# EAGLE board QwiicHUD-Panel (EAGLE 7.7.0), part 1 of 2
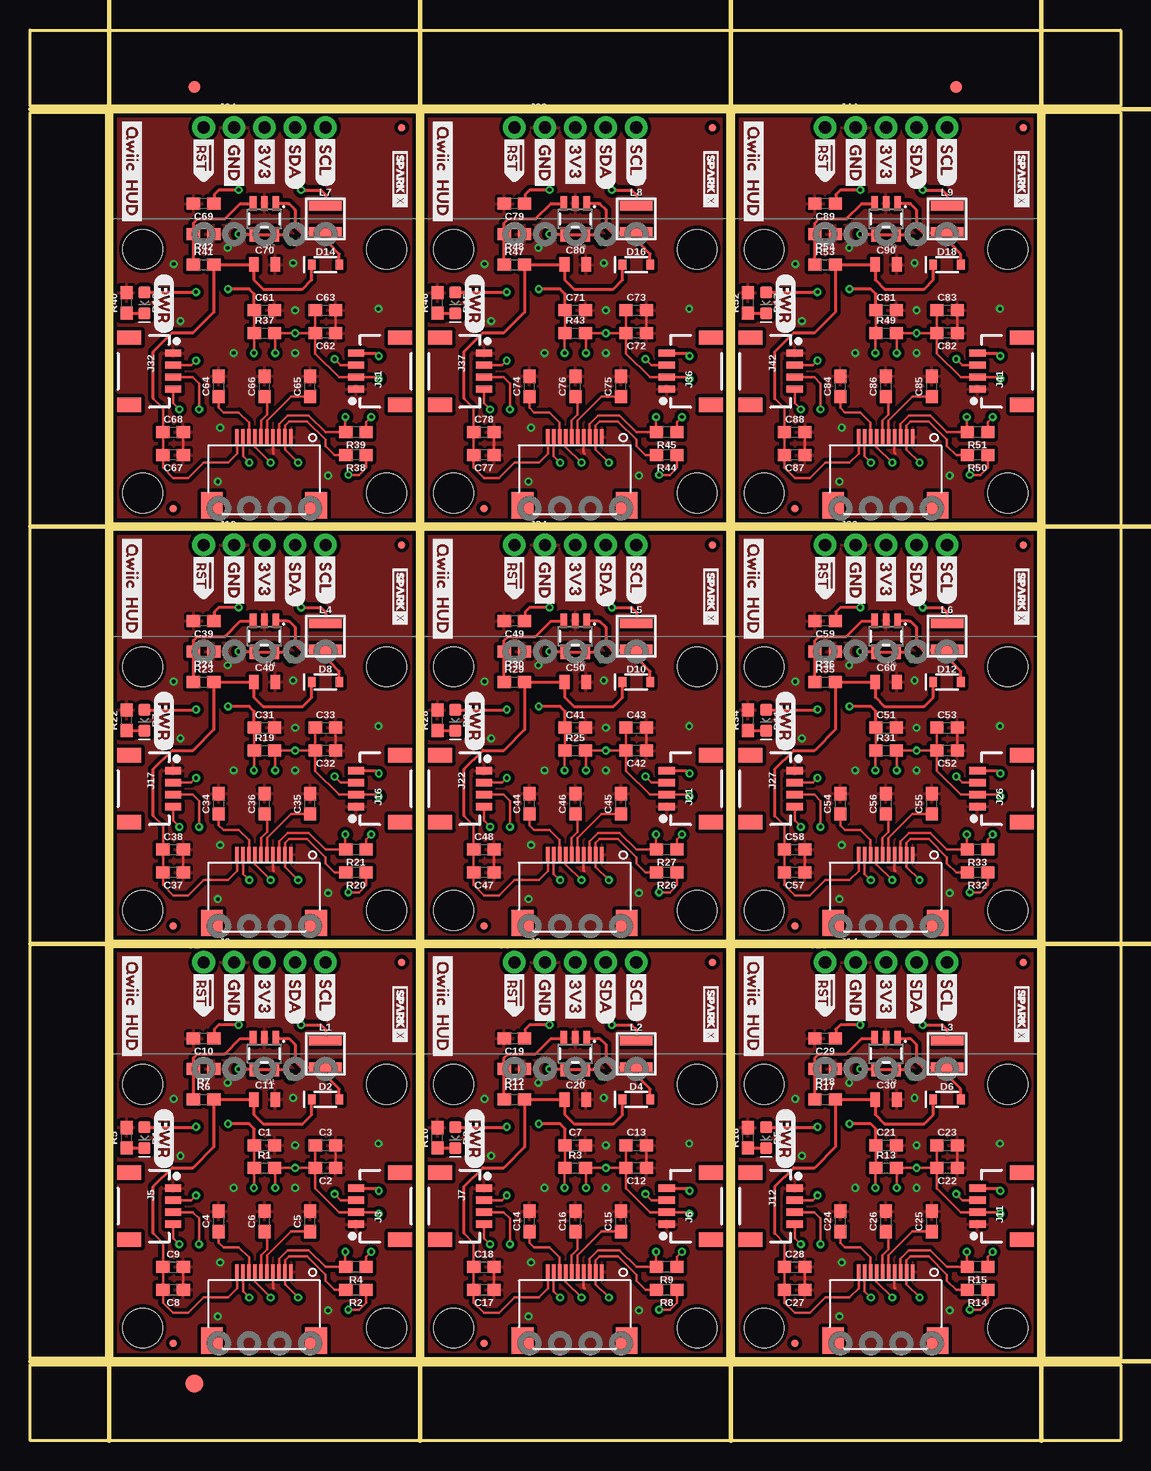
[diagram p0: board, top side]
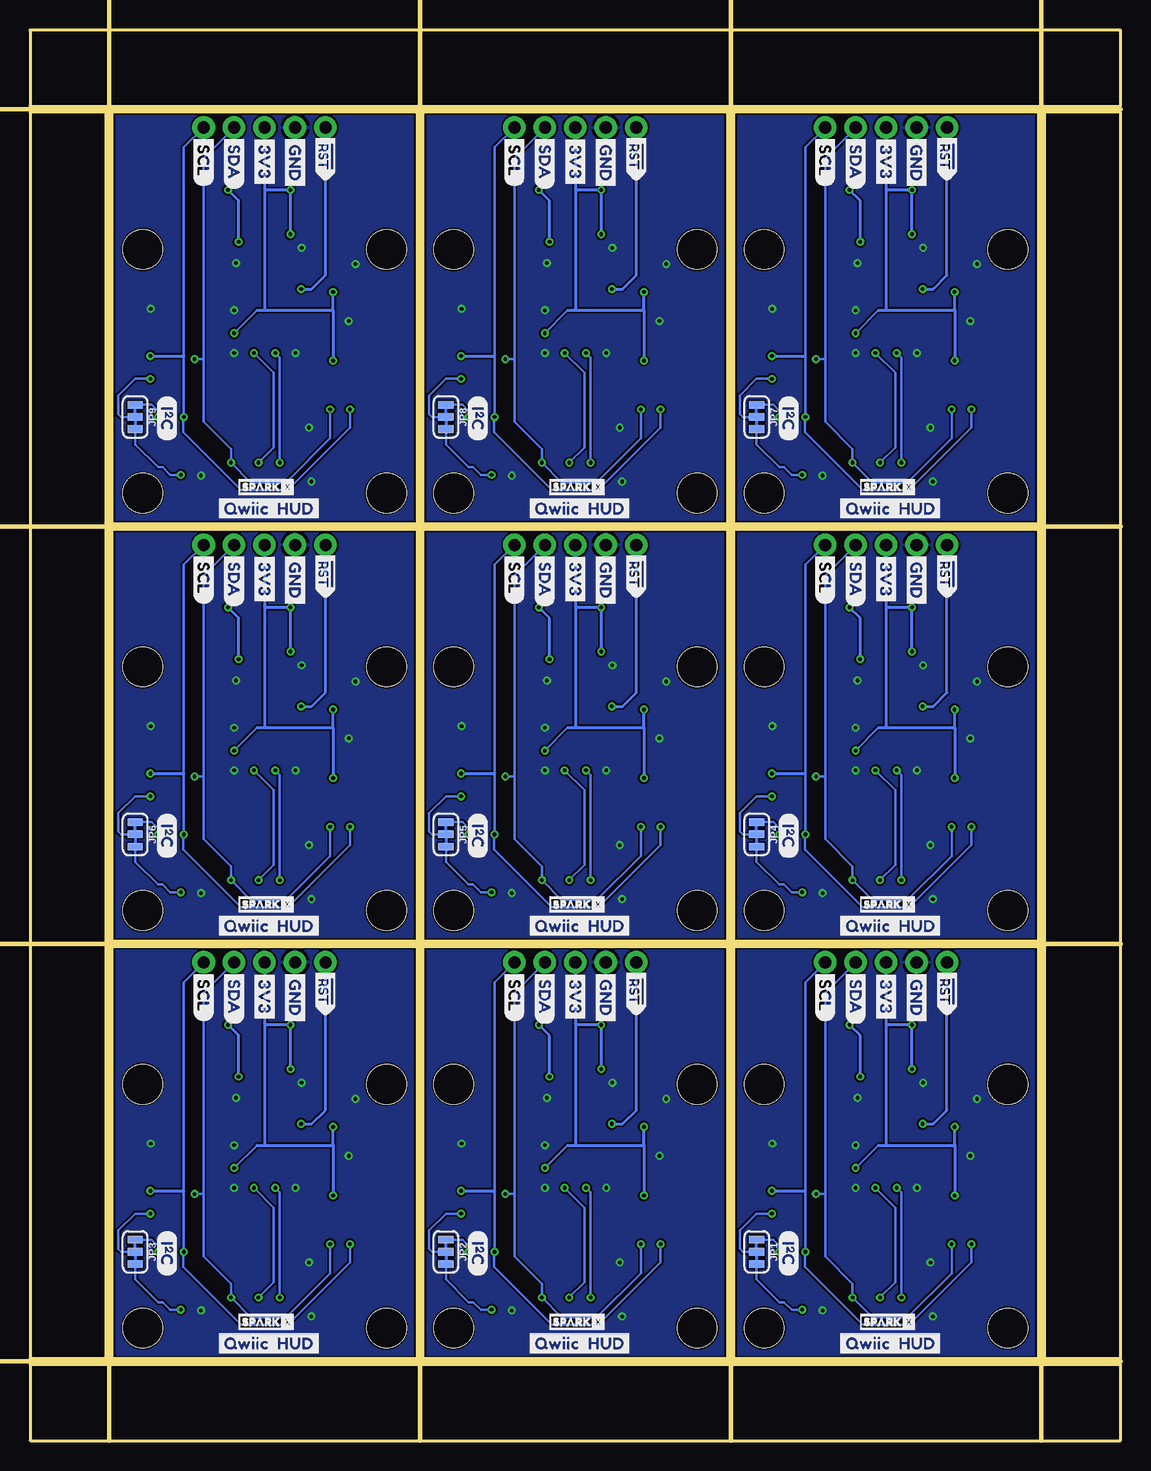
[diagram p1: board, bottom side, seen from below]

Size 90.93 x 117.6 mm. Coordinates in mm from the lower left corner, seen from the top.
Outline: 6.86,41.15 32.26,41.15 32.26,6.86 6.86,6.86 6.86,41.15
Outline: 32.77,41.15 58.17,41.15 58.17,6.86 32.77,6.86 32.77,41.15
Outline: 58.67,41.15 84.07,41.15 84.07,6.86 58.67,6.86 58.67,41.15
Outline: 6.86,75.95 32.26,75.95 32.26,41.66 6.86,41.66 6.86,75.95
Outline: 32.77,75.95 58.17,75.95 58.17,41.66 32.77,41.66 32.77,75.95
Outline: 58.67,75.95 84.07,75.95 84.07,41.66 58.67,41.66 58.67,75.95
Outline: 6.86,110.74 32.26,110.74 32.26,76.45 6.86,76.45 6.86,110.74
Outline: 32.77,110.74 58.17,110.74 58.17,76.45 32.77,76.45 32.77,110.74
Outline: 58.67,110.74 84.07,110.74 84.07,76.45 58.67,76.45 58.67,110.74
Outline: 0,6.35 90.93,6.35 90.93,0 0,0 0,6.35
Outline: 84.58,110.74 90.93,110.74 90.93,6.86 84.58,6.86 84.58,110.74
Outline: 0,117.6 90.93,117.6 90.93,111.25 0,111.25 0,117.6
Outline: 0,110.74 6.35,110.74 6.35,6.86 0,6.86 0,110.74
Copper layers (1*16): Top 0.035mm / dielectric 1.5mm / Bottom 0.035mm
Design rules "SparkFun-2-layer-PCBWay-LIMIT": minimum track width 6mil, minimum drill 0.3mm, track to track 6mil, track to pad 6mil, pad to pad 6mil, via to via 6mil, smd to smd 6mil, copper to edge 6mil, drill to drill 6mil, minimum pad ring 7mil, minimum via ring 7mil, stop-mask expansion 4mil, vias tented up to drill 25mil, thermal gap 10mil
Milling: 8 lines

## Footprints (pad centres in the part's own frame; a part is rotated, then mirrored left to right if it is on the bottom)
0603 = smd 1.1 x 1: 1 -0.85,0; 2 0.85,0
0805 = smd 0.8 x 1.2: 1 -0.9,0; 2 0.9,0
LED-0603 = smd 1 x 1: A -0.877,0; C 0.877,0
SOD-323 = smd 0.63 x 0.83: A 1.15,0; C -1.15,0
FIDUCIAL-1X2 = smd 1 x 1: 1 0,0
FIDUCIAL-1.5X3 = smd 1.5 x 1.5: 1 0,0
FIDUCIAL-MICRO = smd 0.635 x 0.635: 1 0,0
1X01_NO_SILK = drill 1.016 pad 1.88: 1 0,0
1X04_NO_SILK = drill 1.016 pad 1.88: 1 0,0; 2 2.54,0; 3 5.08,0; 4 7.62,0
1X04_1MM_RA = smd 0.6 x 1.35: 1 -1.5,0; 2 -0.5,0; 3 0.5,0; 4 1.5,0 | smd 1.2 x 2: NC1 2.8,-3.675; NC2 -2.8,-3.675
SERIES6288 = smd 0.3 x 1.3: 1 -2.3,3.4; 2 -1.8,3.4; 3 -1.3,3.4; 4 -0.8,3.4; 5 -0.3,3.4; 6 0.2,3.4; 7 0.7,3.4; 8 1.2,3.4; 9 1.7,3.4; 10 2.2,3.4 | smd 1.8 x 2.2: NC1 -4.4,-2.3; NC2 4.3,-2.3
SMT-JUMPER_3_2-NC_TRACE_SILK = smd 0.635 x 1.27: 1 -1.016,0; 2 0,0; 3 1.016,0
INDUCTOR_3X3 = smd 2.7 x 0.8: P$1 0,1.1; P$2 0,-1.1
SOT23-5 = smd 0.55 x 1.2: 1 -0.95,-1.3; 2 0,-1.3; 3 0.95,-1.3; 4 0.95,1.3; 5 -0.95,1.3
QWIIC_BOARD_MOUNT_HOLES = hole 3.302: -10.16,10.16; 10.16,10.16; 10.16,-10.16; -10.16,-10.16

## Placement (x,y rotation side)
C1  2.2uF  [0603]  19.56,24.64 0 top
C2  4.7uF  [0603]  24.64,22.73 180 top
C3  0.1uF  [0603]  24.64,24.64 0 top
C4  1.0uF  [0603]  15.75,18.29 90 top
C5  1.0uF  [0603]  23.37,18.29 90 top
C6  1.0uF  [0603]  19.56,18.29 90 top
C7  2.2uF  [0603]  45.47,24.64 0 top
C8  4.7uF  [0603]  11.94,12.57 180 top
C9  0.1uF  [0603]  11.94,14.48 0 top
C10  1.0uF  [0603]  14.48,33.53 180 top
C11  1.0uF/25V  [0805]  19.56,28.45 0 top
C12  4.7uF  [0603]  50.55,22.73 180 top
C13  0.1uF  [0603]  50.55,24.64 0 top
C14  1.0uF  [0603]  41.66,18.29 90 top
C15  1.0uF  [0603]  49.28,18.29 90 top
C16  1.0uF  [0603]  45.47,18.29 90 top
C17  4.7uF  [0603]  37.85,12.57 180 top
C18  0.1uF  [0603]  37.85,14.48 0 top
C19  1.0uF  [0603]  40.39,33.53 180 top
C20  1.0uF/25V  [0805]  45.47,28.45 0 top
C21  2.2uF  [0603]  71.37,24.64 0 top
C22  4.7uF  [0603]  76.45,22.73 180 top
C23  0.1uF  [0603]  76.45,24.64 0 top
C24  1.0uF  [0603]  67.56,18.29 90 top
C25  1.0uF  [0603]  75.18,18.29 90 top
C26  1.0uF  [0603]  71.37,18.29 90 top
C27  4.7uF  [0603]  63.75,12.57 180 top
C28  0.1uF  [0603]  63.75,14.48 0 top
C29  1.0uF  [0603]  66.29,33.53 180 top
C30  1.0uF/25V  [0805]  71.37,28.45 0 top
C31  2.2uF  [0603]  19.56,59.44 0 top
C32  4.7uF  [0603]  24.64,57.53 180 top
C33  0.1uF  [0603]  24.64,59.44 0 top
C34  1.0uF  [0603]  15.75,53.09 90 top
C35  1.0uF  [0603]  23.37,53.09 90 top
C36  1.0uF  [0603]  19.56,53.09 90 top
C37  4.7uF  [0603]  11.94,47.37 180 top
C38  0.1uF  [0603]  11.94,49.28 0 top
C39  1.0uF  [0603]  14.48,68.33 180 top
C40  1.0uF/25V  [0805]  19.56,63.25 0 top
C41  2.2uF  [0603]  45.47,59.44 0 top
C42  4.7uF  [0603]  50.55,57.53 180 top
C43  0.1uF  [0603]  50.55,59.44 0 top
C44  1.0uF  [0603]  41.66,53.09 90 top
C45  1.0uF  [0603]  49.28,53.09 90 top
C46  1.0uF  [0603]  45.47,53.09 90 top
C47  4.7uF  [0603]  37.85,47.37 180 top
C48  0.1uF  [0603]  37.85,49.28 0 top
C49  1.0uF  [0603]  40.39,68.33 180 top
C50  1.0uF/25V  [0805]  45.47,63.25 0 top
C51  2.2uF  [0603]  71.37,59.44 0 top
C52  4.7uF  [0603]  76.45,57.53 180 top
C53  0.1uF  [0603]  76.45,59.44 0 top
C54  1.0uF  [0603]  67.56,53.09 90 top
C55  1.0uF  [0603]  75.18,53.09 90 top
C56  1.0uF  [0603]  71.37,53.09 90 top
C57  4.7uF  [0603]  63.75,47.37 180 top
C58  0.1uF  [0603]  63.75,49.28 0 top
C59  1.0uF  [0603]  66.29,68.33 180 top
C60  1.0uF/25V  [0805]  71.37,63.25 0 top
C61  2.2uF  [0603]  19.56,94.23 0 top
C62  4.7uF  [0603]  24.64,92.33 180 top
C63  0.1uF  [0603]  24.64,94.23 0 top
C64  1.0uF  [0603]  15.75,87.88 90 top
C65  1.0uF  [0603]  23.37,87.88 90 top
C66  1.0uF  [0603]  19.56,87.88 90 top
C67  4.7uF  [0603]  11.94,82.17 180 top
C68  0.1uF  [0603]  11.94,84.07 0 top
C69  1.0uF  [0603]  14.48,103.12 180 top
C70  1.0uF/25V  [0805]  19.56,98.04 0 top
C71  2.2uF  [0603]  45.47,94.23 0 top
C72  4.7uF  [0603]  50.55,92.33 180 top
C73  0.1uF  [0603]  50.55,94.23 0 top
C74  1.0uF  [0603]  41.66,87.88 90 top
C75  1.0uF  [0603]  49.28,87.88 90 top
C76  1.0uF  [0603]  45.47,87.88 90 top
C77  4.7uF  [0603]  37.85,82.17 180 top
C78  0.1uF  [0603]  37.85,84.07 0 top
C79  1.0uF  [0603]  40.39,103.12 180 top
C80  1.0uF/25V  [0805]  45.47,98.04 0 top
C81  2.2uF  [0603]  71.37,94.23 0 top
C82  4.7uF  [0603]  76.45,92.33 180 top
C83  0.1uF  [0603]  76.45,94.23 0 top
C84  1.0uF  [0603]  67.56,87.88 90 top
C85  1.0uF  [0603]  75.18,87.88 90 top
C86  1.0uF  [0603]  71.37,87.88 90 top
C87  4.7uF  [0603]  63.75,82.17 180 top
C88  0.1uF  [0603]  63.75,84.07 0 top
C89  1.0uF  [0603]  66.29,103.12 180 top
C90  1.0uF/25V  [0805]  71.37,98.04 0 top
D1  RED  [LED-0603]  9.56,25.26 270 top
D2  1A/23V/620mV  [SOD-323]  24.64,28.45 0 top
D3  RED  [LED-0603]  35.47,25.26 270 top
D4  1A/23V/620mV  [SOD-323]  50.55,28.45 0 top
D5  RED  [LED-0603]  61.37,25.26 270 top
D6  1A/23V/620mV  [SOD-323]  76.45,28.45 0 top
D7  RED  [LED-0603]  9.56,60.06 270 top
D8  1A/23V/620mV  [SOD-323]  24.64,63.25 0 top
D9  RED  [LED-0603]  35.47,60.06 270 top
D10  1A/23V/620mV  [SOD-323]  50.55,63.25 0 top
D11  RED  [LED-0603]  61.37,60.06 270 top
D12  1A/23V/620mV  [SOD-323]  76.45,63.25 0 top
D13  RED  [LED-0603]  9.56,94.85 270 top
D14  1A/23V/620mV  [SOD-323]  24.64,98.04 0 top
D15  RED  [LED-0603]  35.47,94.85 270 top
D16  1A/23V/620mV  [SOD-323]  50.55,98.04 0 top
D17  RED  [LED-0603]  61.37,94.85 270 top
D18  1A/23V/620mV  [SOD-323]  76.45,98.04 0 top
E$1  [FIDUCIAL-1X2]  13.72,112.84 0 top
E$2  [FIDUCIAL-1X2]  77.22,112.84 0 top
E$3  [FIDUCIAL-1.5X3]  13.72,4.76 0 top
FD1  FIDUCIALUFIDUCIAL  [FIDUCIAL-MICRO]  11.94,8.13 0 top
FD2  FIDUCIALUFIDUCIAL  [FIDUCIAL-MICRO]  30.99,39.88 0 top
FD3  FIDUCIALUFIDUCIAL  [FIDUCIAL-MICRO]  37.85,8.13 0 top
FD4  FIDUCIALUFIDUCIAL  [FIDUCIAL-MICRO]  56.9,39.88 0 top
FD5  FIDUCIALUFIDUCIAL  [FIDUCIAL-MICRO]  63.75,8.13 0 top
FD6  FIDUCIALUFIDUCIAL  [FIDUCIAL-MICRO]  82.8,39.88 0 top
FD7  FIDUCIALUFIDUCIAL  [FIDUCIAL-MICRO]  11.94,42.93 0 top
FD8  FIDUCIALUFIDUCIAL  [FIDUCIAL-MICRO]  30.99,74.68 0 top
FD9  FIDUCIALUFIDUCIAL  [FIDUCIAL-MICRO]  37.85,42.93 0 top
FD10  FIDUCIALUFIDUCIAL  [FIDUCIAL-MICRO]  56.9,74.68 0 top
FD11  FIDUCIALUFIDUCIAL  [FIDUCIAL-MICRO]  63.75,42.93 0 top
FD12  FIDUCIALUFIDUCIAL  [FIDUCIAL-MICRO]  82.8,74.68 0 top
FD13  FIDUCIALUFIDUCIAL  [FIDUCIAL-MICRO]  11.94,77.72 0 top
FD14  FIDUCIALUFIDUCIAL  [FIDUCIAL-MICRO]  30.99,109.47 0 top
FD15  FIDUCIALUFIDUCIAL  [FIDUCIAL-MICRO]  37.85,77.72 0 top
FD16  FIDUCIALUFIDUCIAL  [FIDUCIAL-MICRO]  56.9,109.47 0 top
FD17  FIDUCIALUFIDUCIAL  [FIDUCIAL-MICRO]  63.75,77.72 0 top
FD18  FIDUCIALUFIDUCIAL  [FIDUCIAL-MICRO]  82.8,109.47 0 top
J1  [1X01_NO_SILK]  14.48,39.88 0 top
J2  [1X04_NO_SILK]  17.02,39.88 0 top
J3  [1X04_1MM_RA]  27.18,19.56 90 top
J4  WISECHIP_HUD_FPC  [SERIES6288]  19.56,10.67 0 top
J5  [1X04_1MM_RA]  11.94,19.56 270 top
J6  [1X04_1MM_RA]  53.09,19.56 90 top
J7  [1X04_1MM_RA]  37.85,19.56 270 top
J8  [1X01_NO_SILK]  40.39,39.88 0 top
J9  [1X04_NO_SILK]  42.93,39.88 0 top
J10  WISECHIP_HUD_FPC  [SERIES6288]  45.47,10.67 0 top
J11  [1X04_1MM_RA]  78.99,19.56 90 top
J12  [1X04_1MM_RA]  63.75,19.56 270 top
J13  [1X01_NO_SILK]  66.29,39.88 0 top
J14  [1X04_NO_SILK]  68.83,39.88 0 top
J15  WISECHIP_HUD_FPC  [SERIES6288]  71.37,10.67 0 top
J16  [1X04_1MM_RA]  27.18,54.36 90 top
J17  [1X04_1MM_RA]  11.94,54.36 270 top
J18  [1X01_NO_SILK]  14.48,74.68 0 top
J19  [1X04_NO_SILK]  17.02,74.68 0 top
J20  WISECHIP_HUD_FPC  [SERIES6288]  19.56,45.47 0 top
J21  [1X04_1MM_RA]  53.09,54.36 90 top
J22  [1X04_1MM_RA]  37.85,54.36 270 top
J23  [1X01_NO_SILK]  40.39,74.68 0 top
J24  [1X04_NO_SILK]  42.93,74.68 0 top
J25  WISECHIP_HUD_FPC  [SERIES6288]  45.47,45.47 0 top
J26  [1X04_1MM_RA]  78.99,54.36 90 top
J27  [1X04_1MM_RA]  63.75,54.36 270 top
J28  [1X01_NO_SILK]  66.29,74.68 0 top
J29  [1X04_NO_SILK]  68.83,74.68 0 top
J30  WISECHIP_HUD_FPC  [SERIES6288]  71.37,45.47 0 top
J31  [1X04_1MM_RA]  27.18,89.15 90 top
J32  [1X04_1MM_RA]  11.94,89.15 270 top
J33  [1X01_NO_SILK]  14.48,109.47 0 top
J34  [1X04_NO_SILK]  17.02,109.47 0 top
J35  WISECHIP_HUD_FPC  [SERIES6288]  19.56,80.26 0 top
J36  [1X04_1MM_RA]  53.09,89.15 90 top
J37  [1X04_1MM_RA]  37.85,89.15 270 top
J38  [1X01_NO_SILK]  40.39,109.47 0 top
J39  [1X04_NO_SILK]  42.93,109.47 0 top
J40  WISECHIP_HUD_FPC  [SERIES6288]  45.47,80.26 0 top
J41  [1X04_1MM_RA]  78.99,89.15 90 top
J42  [1X04_1MM_RA]  63.75,89.15 270 top
J43  [1X01_NO_SILK]  66.29,109.47 0 top
J44  [1X04_NO_SILK]  68.83,109.47 0 top
J45  WISECHIP_HUD_FPC  [SERIES6288]  71.37,80.26 0 top
JP1  [SMT-JUMPER_3_2-NC_TRACE_SILK]  30.35,15.75 270 bottom
JP2  [SMT-JUMPER_3_2-NC_TRACE_SILK]  56.26,15.75 270 bottom
JP3  [SMT-JUMPER_3_2-NC_TRACE_SILK]  82.17,15.75 270 bottom
JP4  [SMT-JUMPER_3_2-NC_TRACE_SILK]  30.35,50.55 270 bottom
JP5  [SMT-JUMPER_3_2-NC_TRACE_SILK]  56.26,50.55 270 bottom
JP6  [SMT-JUMPER_3_2-NC_TRACE_SILK]  82.17,50.55 270 bottom
JP7  [SMT-JUMPER_3_2-NC_TRACE_SILK]  30.35,85.34 270 bottom
JP8  [SMT-JUMPER_3_2-NC_TRACE_SILK]  56.26,85.34 270 bottom
JP9  [SMT-JUMPER_3_2-NC_TRACE_SILK]  82.17,85.34 270 bottom
L1  10uH  [INDUCTOR_3X3]  24.64,32.26 0 top
L2  10uH  [INDUCTOR_3X3]  50.55,32.26 0 top
L3  10uH  [INDUCTOR_3X3]  76.45,32.26 0 top
L4  10uH  [INDUCTOR_3X3]  24.64,67.06 0 top
L5  10uH  [INDUCTOR_3X3]  50.55,67.06 0 top
L6  10uH  [INDUCTOR_3X3]  76.45,67.06 0 top
L7  10uH  [INDUCTOR_3X3]  24.64,101.85 0 top
L8  10uH  [INDUCTOR_3X3]  50.55,101.85 0 top
L9  10uH  [INDUCTOR_3X3]  76.45,101.85 0 top
R1  10k  [0603]  19.56,22.73 0 top
R2  2.2k  [0603]  27.18,12.57 180 top
R3  10k  [0603]  45.47,22.73 0 top
R4  2.2k  [0603]  27.18,14.48 180 top
R5  1k  [0603]  8.06,25.26 90 top
R6  47k  [0603]  14.48,28.45 0 top
R7  5.6k  [0603]  14.48,30.99 180 top
R8  2.2k  [0603]  53.09,12.57 180 top
R9  2.2k  [0603]  53.09,14.48 180 top
R10  1k  [0603]  33.97,25.26 90 top
R11  47k  [0603]  40.39,28.45 0 top
R12  5.6k  [0603]  40.39,30.99 180 top
R13  10k  [0603]  71.37,22.73 0 top
R14  2.2k  [0603]  78.99,12.57 180 top
R15  2.2k  [0603]  78.99,14.48 180 top
R16  1k  [0603]  59.87,25.26 90 top
R17  47k  [0603]  66.29,28.45 0 top
R18  5.6k  [0603]  66.29,30.99 180 top
R19  10k  [0603]  19.56,57.53 0 top
R20  2.2k  [0603]  27.18,47.37 180 top
R21  2.2k  [0603]  27.18,49.28 180 top
R22  1k  [0603]  8.06,60.06 90 top
R23  47k  [0603]  14.48,63.25 0 top
R24  5.6k  [0603]  14.48,65.79 180 top
R25  10k  [0603]  45.47,57.53 0 top
R26  2.2k  [0603]  53.09,47.37 180 top
R27  2.2k  [0603]  53.09,49.28 180 top
R28  1k  [0603]  33.97,60.06 90 top
R29  47k  [0603]  40.39,63.25 0 top
R30  5.6k  [0603]  40.39,65.79 180 top
R31  10k  [0603]  71.37,57.53 0 top
R32  2.2k  [0603]  78.99,47.37 180 top
R33  2.2k  [0603]  78.99,49.28 180 top
R34  1k  [0603]  59.87,60.06 90 top
R35  47k  [0603]  66.29,63.25 0 top
R36  5.6k  [0603]  66.29,65.79 180 top
R37  10k  [0603]  19.56,92.33 0 top
R38  2.2k  [0603]  27.18,82.17 180 top
R39  2.2k  [0603]  27.18,84.07 180 top
R40  1k  [0603]  8.06,94.85 90 top
R41  47k  [0603]  14.48,98.04 0 top
R42  5.6k  [0603]  14.48,100.58 180 top
R43  10k  [0603]  45.47,92.33 0 top
R44  2.2k  [0603]  53.09,82.17 180 top
R45  2.2k  [0603]  53.09,84.07 180 top
R46  1k  [0603]  33.97,94.85 90 top
R47  47k  [0603]  40.39,98.04 0 top
R48  5.6k  [0603]  40.39,100.58 180 top
R49  10k  [0603]  71.37,92.33 0 top
R50  2.2k  [0603]  78.99,82.17 180 top
R51  2.2k  [0603]  78.99,84.07 180 top
R52  1k  [0603]  59.87,94.85 90 top
R53  47k  [0603]  66.29,98.04 0 top
R54  5.6k  [0603]  66.29,100.58 180 top
U1  AP3012  [SOT23-5]  19.56,32.26 180 top
U2  AP3012  [SOT23-5]  45.47,32.26 180 top
U3  AP3012  [SOT23-5]  71.37,32.26 180 top
U4  AP3012  [SOT23-5]  19.56,67.06 180 top
U5  AP3012  [SOT23-5]  45.47,67.06 180 top
U6  AP3012  [SOT23-5]  71.37,67.06 180 top
U7  AP3012  [SOT23-5]  19.56,101.85 180 top
U8  AP3012  [SOT23-5]  45.47,101.85 180 top
U9  AP3012  [SOT23-5]  71.37,101.85 180 top
U$1  [#RST>]  14.48,39.5 270 top
U$2  QWIIC_BOARD_OUTLINEH  [QWIIC_BOARD_MOUNT_HOLES]  19.56,19.56 0 top
U$3  [SPARKX-TINY]  30.86,35.56 270 top
U$4  [SPARKX-TINY]  19.43,9.91 0 bottom
U$5  [GND]  17.02,39.37 270 top
U$6  [3V3]  19.56,39.37 270 top
U$7  [SDA]  22.1,39.37 270 top
U$8  [SCL]  24.64,39.37 270 top
U$9  [(PWR)]  11.18,27.69 270 top
U$10  [SDA]  22.1,39.37 270 bottom
U$11  [SCL]  24.64,39.37 270 bottom
U$12  [3V3]  19.56,39.37 270 bottom
U$13  [GND]  17.02,39.37 270 bottom
U$14  [#RST>]  14.48,39.62 270 bottom
U$15  QWIIC_BOARD_OUTLINEH  [QWIIC_BOARD_MOUNT_HOLES]  45.47,19.56 0 top
U$16  [QWIIC0]  8.51,40.89 270 top
U$17  [HUD1]  8.51,36.45 270 top
U$18  [QWIIC0]  23.88,8.13 0 bottom
U$19  [HUD1]  19.43,8.13 0 bottom
U$20  [(I_SUPER2_C)]  27.69,17.53 270 bottom
U$21  [SPARKX-TINY]  56.77,35.56 270 top
U$22  [SPARKX-TINY]  45.34,9.91 0 bottom
U$23  [#RST>]  40.39,39.5 270 top
U$24  [GND]  42.93,39.37 270 top
U$25  [3V3]  45.47,39.37 270 top
U$26  [SDA]  48.01,39.37 270 top
U$27  [SCL]  50.55,39.37 270 top
U$28  [(PWR)]  37.08,27.69 270 top
U$29  [SDA]  48.01,39.37 270 bottom
U$30  [SCL]  50.55,39.37 270 bottom
U$31  [3V3]  45.47,39.37 270 bottom
U$32  [GND]  42.93,39.37 270 bottom
U$33  [#RST>]  40.39,39.62 270 bottom
U$34  [QWIIC0]  34.42,40.89 270 top
U$35  [HUD1]  34.42,36.45 270 top
U$36  [QWIIC0]  49.78,8.13 0 bottom
U$37  [HUD1]  45.34,8.13 0 bottom
U$38  [(I_SUPER2_C)]  53.59,17.53 270 bottom
U$39  QWIIC_BOARD_OUTLINEH  [QWIIC_BOARD_MOUNT_HOLES]  71.37,19.56 0 top
U$40  [SPARKX-TINY]  82.68,35.56 270 top
U$41  [SPARKX-TINY]  71.25,9.91 0 bottom
U$42  [#RST>]  66.29,39.5 270 top
U$43  [GND]  68.83,39.37 270 top
U$44  [3V3]  71.37,39.37 270 top
U$45  [SDA]  73.91,39.37 270 top
U$46  [SCL]  76.45,39.37 270 top
U$47  [(PWR)]  62.99,27.69 270 top
U$48  [SDA]  73.91,39.37 270 bottom
U$49  [SCL]  76.45,39.37 270 bottom
U$50  [3V3]  71.37,39.37 270 bottom
U$51  [GND]  68.83,39.37 270 bottom
U$52  [#RST>]  66.29,39.62 270 bottom
U$53  [QWIIC0]  60.32,40.89 270 top
U$54  [HUD1]  60.32,36.45 270 top
U$55  [QWIIC0]  75.69,8.13 0 bottom
U$56  [HUD1]  71.25,8.13 0 bottom
U$57  [(I_SUPER2_C)]  79.5,17.53 270 bottom
U$58  QWIIC_BOARD_OUTLINEH  [QWIIC_BOARD_MOUNT_HOLES]  19.56,54.36 0 top
U$59  [SPARKX-TINY]  30.86,70.36 270 top
U$60  [SPARKX-TINY]  19.43,44.7 0 bottom
U$61  [#RST>]  14.48,74.3 270 top
U$62  [GND]  17.02,74.17 270 top
U$63  [3V3]  19.56,74.17 270 top
U$64  [SDA]  22.1,74.17 270 top
U$65  [SCL]  24.64,74.17 270 top
U$66  [(PWR)]  11.18,62.48 270 top
U$67  [SDA]  22.1,74.17 270 bottom
U$68  [SCL]  24.64,74.17 270 bottom
U$69  [3V3]  19.56,74.17 270 bottom
U$70  [GND]  17.02,74.17 270 bottom
U$71  [#RST>]  14.48,74.42 270 bottom
U$72  [QWIIC0]  8.51,75.69 270 top
U$73  [HUD1]  8.51,71.25 270 top
U$74  [QWIIC0]  23.88,42.93 0 bottom
U$75  [HUD1]  19.43,42.93 0 bottom
U$76  [(I_SUPER2_C)]  27.69,52.32 270 bottom
U$77  QWIIC_BOARD_OUTLINEH  [QWIIC_BOARD_MOUNT_HOLES]  45.47,54.36 0 top
U$78  [SPARKX-TINY]  56.77,70.36 270 top
U$79  [SPARKX-TINY]  45.34,44.7 0 bottom
U$80  [#RST>]  40.39,74.3 270 top
U$81  [GND]  42.93,74.17 270 top
U$82  [3V3]  45.47,74.17 270 top
U$83  [SDA]  48.01,74.17 270 top
U$84  [SCL]  50.55,74.17 270 top
U$85  [(PWR)]  37.08,62.48 270 top
U$86  [SDA]  48.01,74.17 270 bottom
U$87  [SCL]  50.55,74.17 270 bottom
U$88  [3V3]  45.47,74.17 270 bottom
U$89  [GND]  42.93,74.17 270 bottom
U$90  [#RST>]  40.39,74.42 270 bottom
U$91  [QWIIC0]  34.42,75.69 270 top
U$92  [HUD1]  34.42,71.25 270 top
U$93  [QWIIC0]  49.78,42.93 0 bottom
U$94  [HUD1]  45.34,42.93 0 bottom
U$95  [(I_SUPER2_C)]  53.59,52.32 270 bottom
U$96  QWIIC_BOARD_OUTLINEH  [QWIIC_BOARD_MOUNT_HOLES]  71.37,54.36 0 top
U$97  [SPARKX-TINY]  82.68,70.36 270 top
U$98  [SPARKX-TINY]  71.25,44.7 0 bottom
U$99  [#RST>]  66.29,74.3 270 top
U$100  [GND]  68.83,74.17 270 top
U$101  [3V3]  71.37,74.17 270 top
U$102  [SDA]  73.91,74.17 270 top
U$103  [SCL]  76.45,74.17 270 top
U$104  [(PWR)]  62.99,62.48 270 top
U$105  [SDA]  73.91,74.17 270 bottom
U$106  [SCL]  76.45,74.17 270 bottom
U$107  [3V3]  71.37,74.17 270 bottom
U$108  [GND]  68.83,74.17 270 bottom
U$109  [#RST>]  66.29,74.42 270 bottom
U$110  [QWIIC0]  60.32,75.69 270 top
U$111  [HUD1]  60.32,71.25 270 top
U$112  [QWIIC0]  75.69,42.93 0 bottom
U$113  [HUD1]  71.25,42.93 0 bottom
U$114  [(I_SUPER2_C)]  79.5,52.32 270 bottom
U$115  QWIIC_BOARD_OUTLINEH  [QWIIC_BOARD_MOUNT_HOLES]  19.56,89.15 0 top
U$116  [SPARKX-TINY]  30.86,105.16 270 top
U$117  [SPARKX-TINY]  19.43,79.5 0 bottom
U$118  [#RST>]  14.48,109.09 270 top
U$119  [GND]  17.02,108.97 270 top
U$120  [3V3]  19.56,108.97 270 top
U$121  [SDA]  22.1,108.97 270 top
U$122  [SCL]  24.64,108.97 270 top
U$123  [(PWR)]  11.18,97.28 270 top
U$124  [SDA]  22.1,108.97 270 bottom
U$125  [SCL]  24.64,108.97 270 bottom
U$126  [3V3]  19.56,108.97 270 bottom
U$127  [GND]  17.02,108.97 270 bottom
U$128  [#RST>]  14.48,109.22 270 bottom
U$129  [QWIIC0]  8.51,110.49 270 top
U$130  [HUD1]  8.51,106.05 270 top
U$131  [QWIIC0]  23.88,77.72 0 bottom
U$132  [HUD1]  19.43,77.72 0 bottom
U$133  [(I_SUPER2_C)]  27.69,87.12 270 bottom
U$134  QWIIC_BOARD_OUTLINEH  [QWIIC_BOARD_MOUNT_HOLES]  45.47,89.15 0 top
U$135  [SPARKX-TINY]  56.77,105.16 270 top
U$136  [SPARKX-TINY]  45.34,79.5 0 bottom
U$137  [#RST>]  40.39,109.09 270 top
U$138  [GND]  42.93,108.97 270 top
U$139  [3V3]  45.47,108.97 270 top
U$140  [SDA]  48.01,108.97 270 top
U$141  [SCL]  50.55,108.97 270 top
U$142  [(PWR)]  37.08,97.28 270 top
U$143  [SDA]  48.01,108.97 270 bottom
U$144  [SCL]  50.55,108.97 270 bottom
U$145  [3V3]  45.47,108.97 270 bottom
U$146  [GND]  42.93,108.97 270 bottom
U$147  [#RST>]  40.39,109.22 270 bottom
U$148  [QWIIC0]  34.42,110.49 270 top
U$149  [HUD1]  34.42,106.05 270 top
U$150  [QWIIC0]  49.78,77.72 0 bottom
U$151  [HUD1]  45.34,77.72 0 bottom
U$152  [(I_SUPER2_C)]  53.59,87.12 270 bottom
U$153  QWIIC_BOARD_OUTLINEH  [QWIIC_BOARD_MOUNT_HOLES]  71.37,89.15 0 top
U$154  [SPARKX-TINY]  82.68,105.16 270 top
U$155  [SPARKX-TINY]  71.25,79.5 0 bottom
U$156  [#RST>]  66.29,109.09 270 top
U$157  [GND]  68.83,108.97 270 top
U$158  [3V3]  71.37,108.97 270 top
U$159  [SDA]  73.91,108.97 270 top
U$160  [SCL]  76.45,108.97 270 top
U$161  [(PWR)]  62.99,97.28 270 top
U$162  [SDA]  73.91,108.97 270 bottom
U$163  [SCL]  76.45,108.97 270 bottom
U$164  [3V3]  71.37,108.97 270 bottom
U$165  [GND]  68.83,108.97 270 bottom
U$166  [#RST>]  66.29,109.22 270 bottom
U$167  [QWIIC0]  60.32,110.49 270 top
U$168  [HUD1]  60.32,106.05 270 top
U$169  [QWIIC0]  75.69,77.72 0 bottom
U$170  [HUD1]  71.25,77.72 0 bottom
U$171  [(I_SUPER2_C)]  79.5,87.12 270 bottom

## Library data of the parts
C1 C7 C21 C31 C41 C51 C61 C71 C81 = SparkFun-Capacitors; PROD_ID: CAP-07888
C2 C8 C12 C17 C22 C27 C32 C37 C42 C47 C52 C57 C62 C67 C72 C77 C82 C87 = SparkFun-Capacitors; PROD_ID: CAP-08280
C3 C9 C13 C18 C23 C28 C33 C38 C43 C48 C53 C58 C63 C68 C73 C78 C83 C88 = SparkFun-Capacitors; PROD_ID: CAP-08604
C4-C6 C10 C14-C16 C19 C24-C26 C29 C34-C36 C39 C44-C46 C49 C54-C56 C59 C64-C66 C69 C74-C76 C79 C84-C86 C89 = SparkFun-Capacitors; PROD_ID: CAP-00868
C11 C20 C30 C40 C50 C60 C70 C80 C90 = SparkFun-Capacitors; PROD_ID: CAP-11625
D1 D3 D5 D7 D9 D11 D13 D15 D17 = SparkFun-LED; PROD_ID: DIO-00819
D2 D4 D6 D8 D10 D12 D14 D16 D18 = SparkFun-DiscreteSemi; PROD_ID: DIO-11623
E$1 E$2 FD1-FD18 = SparkFun-Aesthetics
E$3 = SparkFun-Retired
J1 J8 J13 J18 J23 J28 J33 J38 J43 = SparkFun-Connectors
J2 J3 J5-J7 J9 J11 J12 J14 J16 J17 J19 J21 J22 J24 J26 J27 J29 J31 J32 J34 J36 J37 J39 J41 J42 J44 U$2-U$4 U$15 U$21 U$22 U$39-U$41 U$58-U$60 U$77-U$79 U$96-U$98 U$115-U$117 U$134-U$136 U$153-U$155 = SparkX
J4 J10 J15 J20 J25 J30 J35 J40 J45 = WiseChipHUD
JP1-JP9 = SparkFun-Jumpers
L1-L9 U1-U9 = 1.81_Greyscale_OLED_Breakout
R1 R3 R13 R19 R25 R31 R37 R43 R49 = SparkFun-Resistors; PROD_ID: RES-00824
R2 R4 R8 R9 R14 R15 R20 R21 R26 R27 R32 R33 R38 R39 R44 R45 R50 R51 = SparkFun-Resistors; PROD_ID: RES-08272
R5 R10 R16 R22 R28 R34 R40 R46 R52 = SparkFun-Resistors; PROD_ID: RES-07856
R6 R11 R17 R23 R29 R35 R41 R47 R53 = SparkFun-Resistors; PROD_ID: RES-07871
R7 R12 R18 R24 R30 R36 R42 R48 R54 = SparkFun-Resistors; PROD_ID: RES-12378
U$1 U$5-U$14 U$20 U$23-U$33 U$38 U$42-U$52 U$57 U$61-U$71 U$76 U$80-U$90 U$95 U$99-U$109 U$114 U$118-U$128 U$133 U$137-U$147 U$152 U$156-U$166 U$171 = Labels-0_04
U$16-U$19 U$34-U$37 U$53-U$56 U$72-U$75 U$91-U$94 U$110-U$113 U$129-U$132 U$148-U$151 U$167-U$170 = buzzard_labels (1)

## Nets
3.3V: C2.2 C3.1 C10.1 D1.A J2.2 J3.2 J4.4 J5.2 JP1.2 L1.P$1 R1.2 U1.4 U1.5
3.3V1: C12.2 C13.1 C19.1 D3.A J6.2 J7.2 J9.2 J10.4 JP2.2 L2.P$1 R3.2 U2.4 U2.5
3.3V2: C22.2 C23.1 C29.1 D5.A J11.2 J12.2 J14.2 J15.4 JP3.2 L3.P$1 R13.2 U3.4 U3.5
3.3V3: C32.2 C33.1 C39.1 D7.A J16.2 J17.2 J19.2 J20.4 JP4.2 L4.P$1 R19.2 U4.4 U4.5
3.3V4: C42.2 C43.1 C49.1 D9.A J21.2 J22.2 J24.2 J25.4 JP5.2 L5.P$1 R25.2 U5.4 U5.5
3.3V5: C52.2 C53.1 C59.1 D11.A J26.2 J27.2 J29.2 J30.4 JP6.2 L6.P$1 R31.2 U6.4 U6.5
3.3V6: C62.2 C63.1 C69.1 D13.A J31.2 J32.2 J34.2 J35.4 JP7.2 L7.P$1 R37.2 U7.4 U7.5
3.3V7: C72.2 C73.1 C79.1 D15.A J36.2 J37.2 J39.2 J40.4 JP8.2 L8.P$1 R43.2 U8.4 U8.5
3.3V8: C82.2 C83.1 C89.1 D17.A J41.2 J42.2 J44.2 J45.4 JP9.2 L9.P$1 R49.2 U9.4 U9.5
12V: C8.2 C9.1 C11.1 D2.C J4.1 R6.2
12V1: C17.2 C18.1 C20.1 D4.C J10.1 R11.2
12V2: C27.2 C28.1 C30.1 D6.C J15.1 R17.2
12V3: C37.2 C38.1 C40.1 D8.C J20.1 R23.2
12V4: C47.2 C48.1 C50.1 D10.C J25.1 R29.2
12V5: C57.2 C58.1 C60.1 D12.C J30.1 R35.2
12V6: C67.2 C68.1 C70.1 D14.C J35.1 R41.2
12V7: C77.2 C78.1 C80.1 D16.C J40.1 R47.2
12V8: C87.2 C88.1 C90.1 D18.C J45.1 R53.2
!RST: C1.1 J1.1 J4.2 R1.1
!RST1: C7.1 J8.1 J10.2 R3.1
!RST2: C21.1 J13.1 J15.2 R13.1
!RST3: C31.1 J18.1 J20.2 R19.1
!RST4: C41.1 J23.1 J25.2 R25.1
!RST5: C51.1 J28.1 J30.2 R31.1
!RST6: C61.1 J33.1 J35.2 R37.1
!RST7: C71.1 J38.1 J40.2 R43.1
!RST8: C81.1 J43.1 J45.2 R49.1
GND: C1.2 C2.1 C3.2 C4.2 C5.2 C6.2 C8.1 C9.2 C10.2 C11.2 J2.1 J3.1 J4.7 J4.10 J5.1 R5.2 R7.1 U1.2
GND1: C7.2 C12.1 C13.2 C14.2 C15.2 C16.2 C17.1 C18.2 C19.2 C20.2 J6.1 J7.1 J9.1 J10.7 J10.10 R10.2 R12.1 U2.2
GND2: C21.2 C22.1 C23.2 C24.2 C25.2 C26.2 C27.1 C28.2 C29.2 C30.2 J11.1 J12.1 J14.1 J15.7 J15.10 R16.2 R18.1 U3.2
GND3: C31.2 C32.1 C33.2 C34.2 C35.2 C36.2 C37.1 C38.2 C39.2 C40.2 J16.1 J17.1 J19.1 J20.7 J20.10 R22.2 R24.1 U4.2
GND4: C41.2 C42.1 C43.2 C44.2 C45.2 C46.2 C47.1 C48.2 C49.2 C50.2 J21.1 J22.1 J24.1 J25.7 J25.10 R28.2 R30.1 U5.2
GND5: C51.2 C52.1 C53.2 C54.2 C55.2 C56.2 C57.1 C58.2 C59.2 C60.2 J26.1 J27.1 J29.1 J30.7 J30.10 R34.2 R36.1 U6.2
GND6: C61.2 C62.1 C63.2 C64.2 C65.2 C66.2 C67.1 C68.2 C69.2 C70.2 J31.1 J32.1 J34.1 J35.7 J35.10 R40.2 R42.1 U7.2
GND7: C71.2 C72.1 C73.2 C74.2 C75.2 C76.2 C77.1 C78.2 C79.2 C80.2 J36.1 J37.1 J39.1 J40.7 J40.10 R46.2 R48.1 U8.2
GND8: C81.2 C82.1 C83.2 C84.2 C85.2 C86.2 C87.1 C88.2 C89.2 C90.2 J41.1 J42.1 J44.1 J45.7 J45.10 R52.2 R54.1 U9.2
IC1: C6.1 J4.5
IC2: C5.1 J4.6
IC3: C4.1 J4.3
IC4: C14.1 J10.3
IC5: C16.1 J10.5
IC6: C15.1 J10.6
IC7: C24.1 J15.3
IC8: C26.1 J15.5
IC9: C25.1 J15.6
IC10: C34.1 J20.3
IC11: C36.1 J20.5
IC12: C35.1 J20.6
IC13: C44.1 J25.3
IC14: C46.1 J25.5
IC15: C45.1 J25.6
IC16: C54.1 J30.3
IC17: C56.1 J30.5
IC18: C55.1 J30.6
IC19: C64.1 J35.3
IC20: C66.1 J35.5
IC21: C65.1 J35.6
IC22: C74.1 J40.3
IC23: C76.1 J40.5
IC24: C75.1 J40.6
IC25: C84.1 J45.3
IC26: C86.1 J45.5
IC27: C85.1 J45.6
N$1: JP1.3 R2.1
N$2: JP1.1 R4.1
N$3: D1.C R5.1
N$4: D2.A L1.P$2 U1.1
N$5: R6.1 R7.2 U1.3
N$6: JP2.3 R8.1
N$7: JP2.1 R9.1
N$8: D3.C R10.1
N$9: D4.A L2.P$2 U2.1
N$10: R11.1 R12.2 U2.3
N$11: JP3.3 R14.1
N$12: JP3.1 R15.1
N$13: D5.C R16.1
N$14: D6.A L3.P$2 U3.1
N$15: R17.1 R18.2 U3.3
N$16: JP4.3 R20.1
N$17: JP4.1 R21.1
N$18: D7.C R22.1
N$19: D8.A L4.P$2 U4.1
N$20: R23.1 R24.2 U4.3
N$21: JP5.3 R26.1
N$22: JP5.1 R27.1
N$23: D9.C R28.1
N$24: D10.A L5.P$2 U5.1
N$25: R29.1 R30.2 U5.3
N$26: JP6.3 R32.1
N$27: JP6.1 R33.1
N$28: D11.C R34.1
N$29: D12.A L6.P$2 U6.1
N$30: R35.1 R36.2 U6.3
N$31: JP7.3 R38.1
N$32: JP7.1 R39.1
N$33: D13.C R40.1
N$34: D14.A L7.P$2 U7.1
N$35: R41.1 R42.2 U7.3
N$36: JP8.3 R44.1
N$37: JP8.1 R45.1
N$38: D15.C R46.1
N$39: D16.A L8.P$2 U8.1
N$40: R47.1 R48.2 U8.3
N$41: JP9.3 R50.1
N$42: JP9.1 R51.1
N$43: D17.C R52.1
N$44: D18.A L9.P$2 U9.1
N$45: R53.1 R54.2 U9.3
SCL: J2.4 J3.4 J4.8 J5.4 R4.2
SCL1: J6.4 J7.4 J9.4 J10.8 R9.2
SCL2: J11.4 J12.4 J14.4 J15.8 R15.2
SCL3: J16.4 J17.4 J19.4 J20.8 R21.2
SCL4: J21.4 J22.4 J24.4 J25.8 R27.2
SCL5: J26.4 J27.4 J29.4 J30.8 R33.2
SCL6: J31.4 J32.4 J34.4 J35.8 R39.2
SCL7: J36.4 J37.4 J39.4 J40.8 R45.2
SCL8: J41.4 J42.4 J44.4 J45.8 R51.2
SDA: J2.3 J3.3 J4.9 J5.3 R2.2
SDA1: J6.3 J7.3 J9.3 J10.9 R8.2
SDA2: J11.3 J12.3 J14.3 J15.9 R14.2
SDA3: J16.3 J17.3 J19.3 J20.9 R20.2
SDA4: J21.3 J22.3 J24.3 J25.9 R26.2
SDA5: J26.3 J27.3 J29.3 J30.9 R32.2
SDA6: J31.3 J32.3 J34.3 J35.9 R38.2
SDA7: J36.3 J37.3 J39.3 J40.9 R44.2
SDA8: J41.3 J42.3 J44.3 J45.9 R50.2